# Altium PCB BRD150309.pcbdoc
Units mil, origin at the board's own origin, x right, y up, seen from the top; angles counter-clockwise.
Board outline 1161.42 x 1692.91 mil, 2 copper layers (Top Layer, Bottom Layer), stack 63.824 mil thick; 44 components, 28 nets, 118 pads, 10 vias.
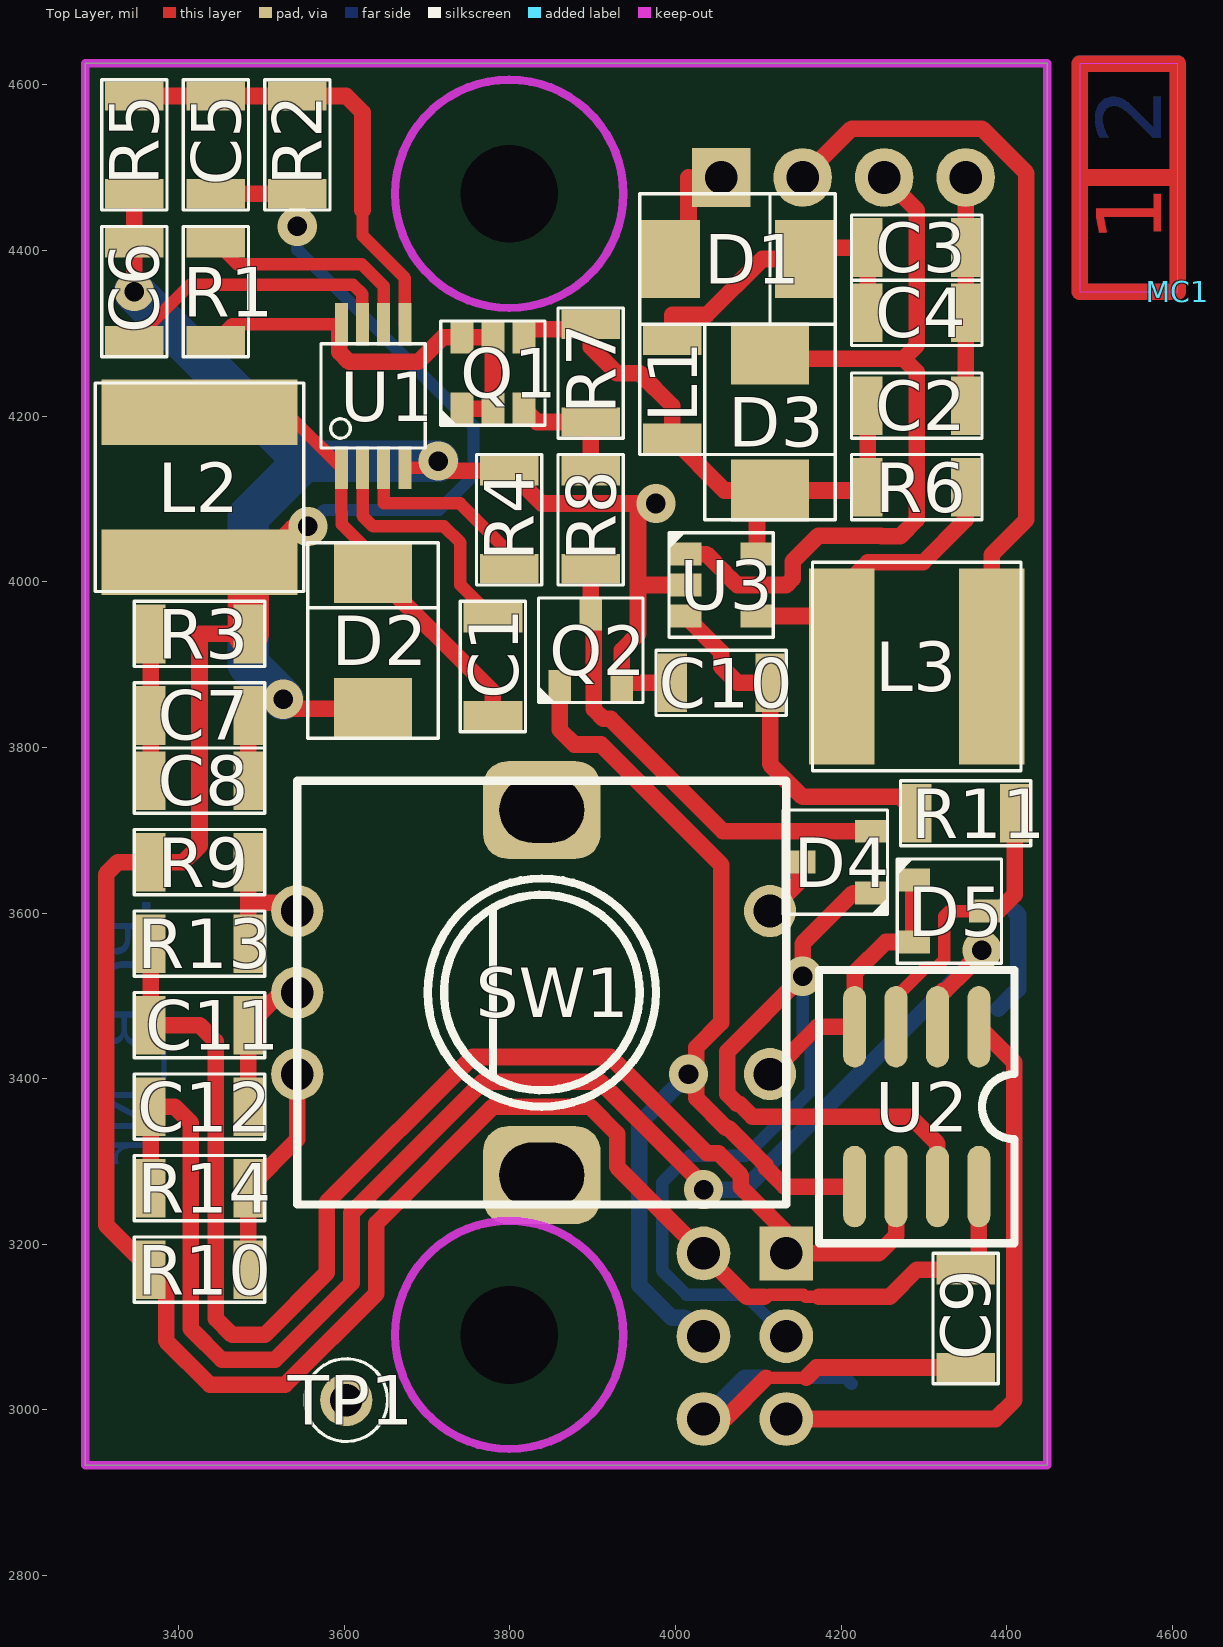
[diagram p0: Top Layer view]
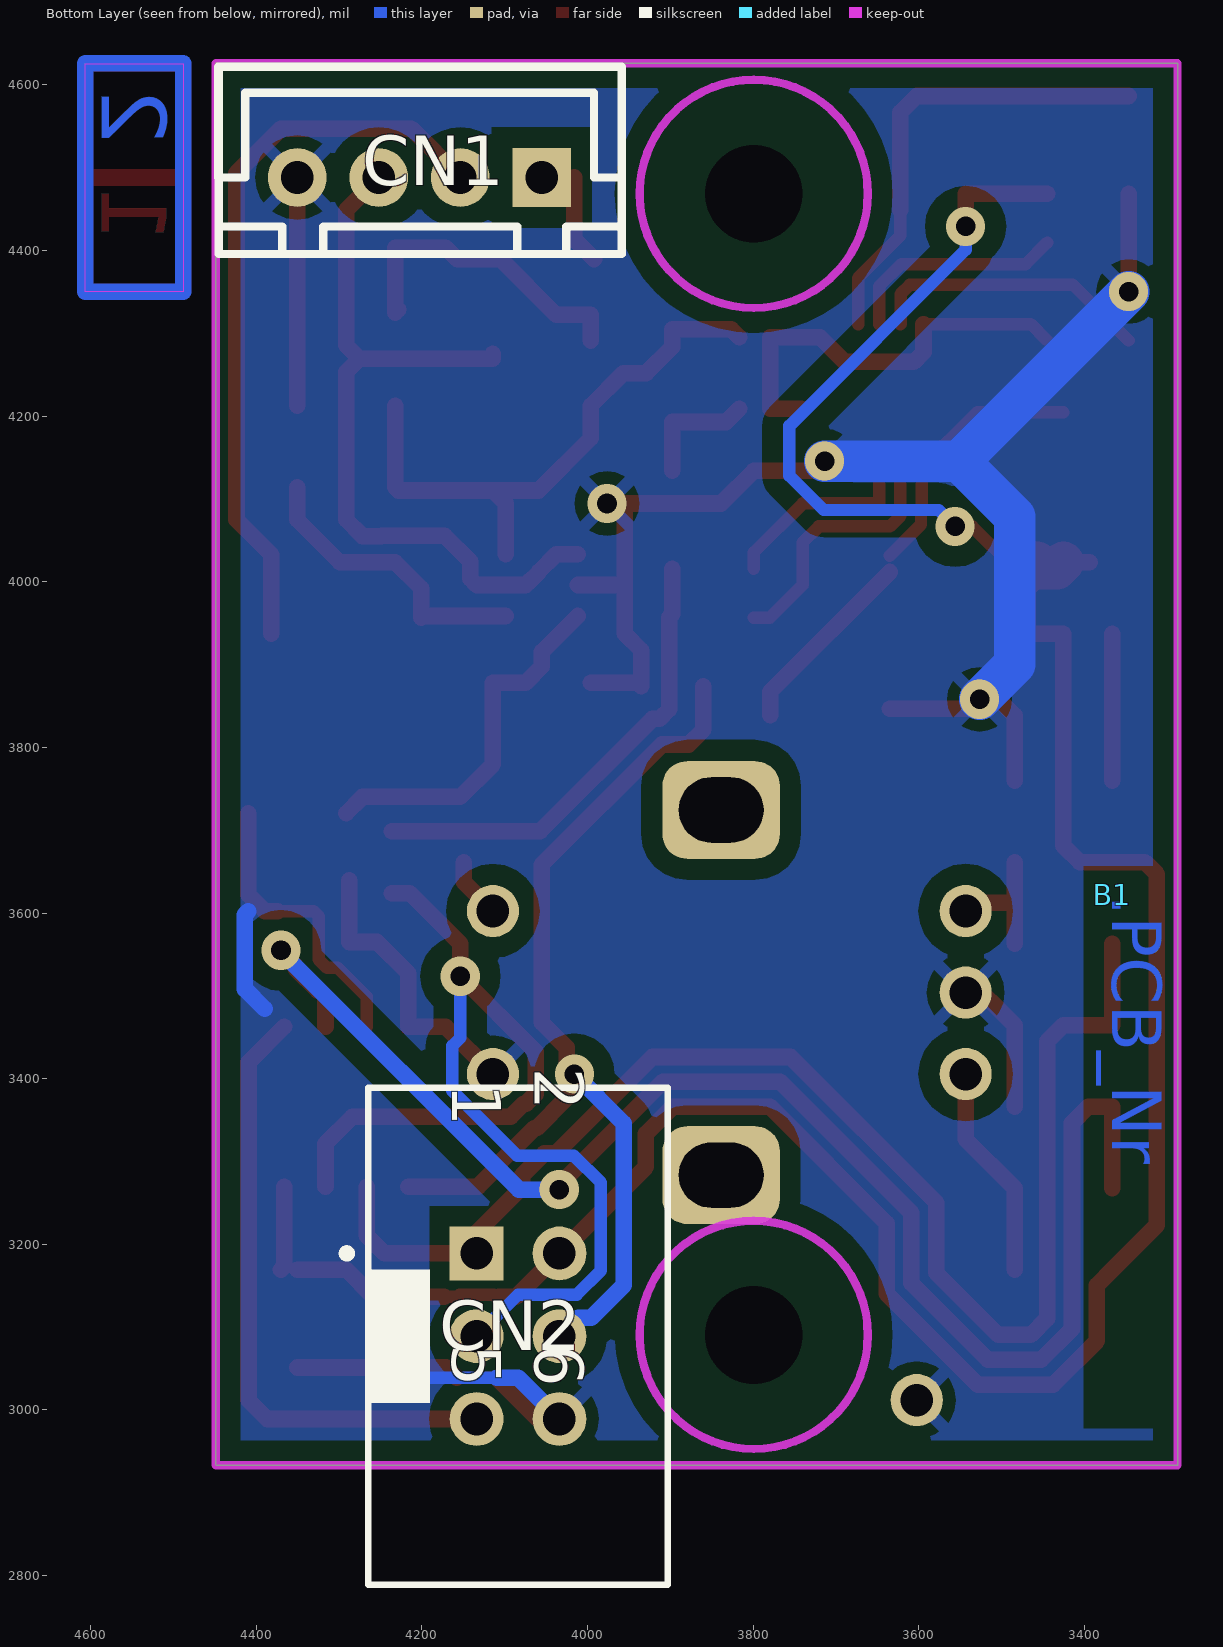
[diagram p1: Bottom Layer view, seen from below]
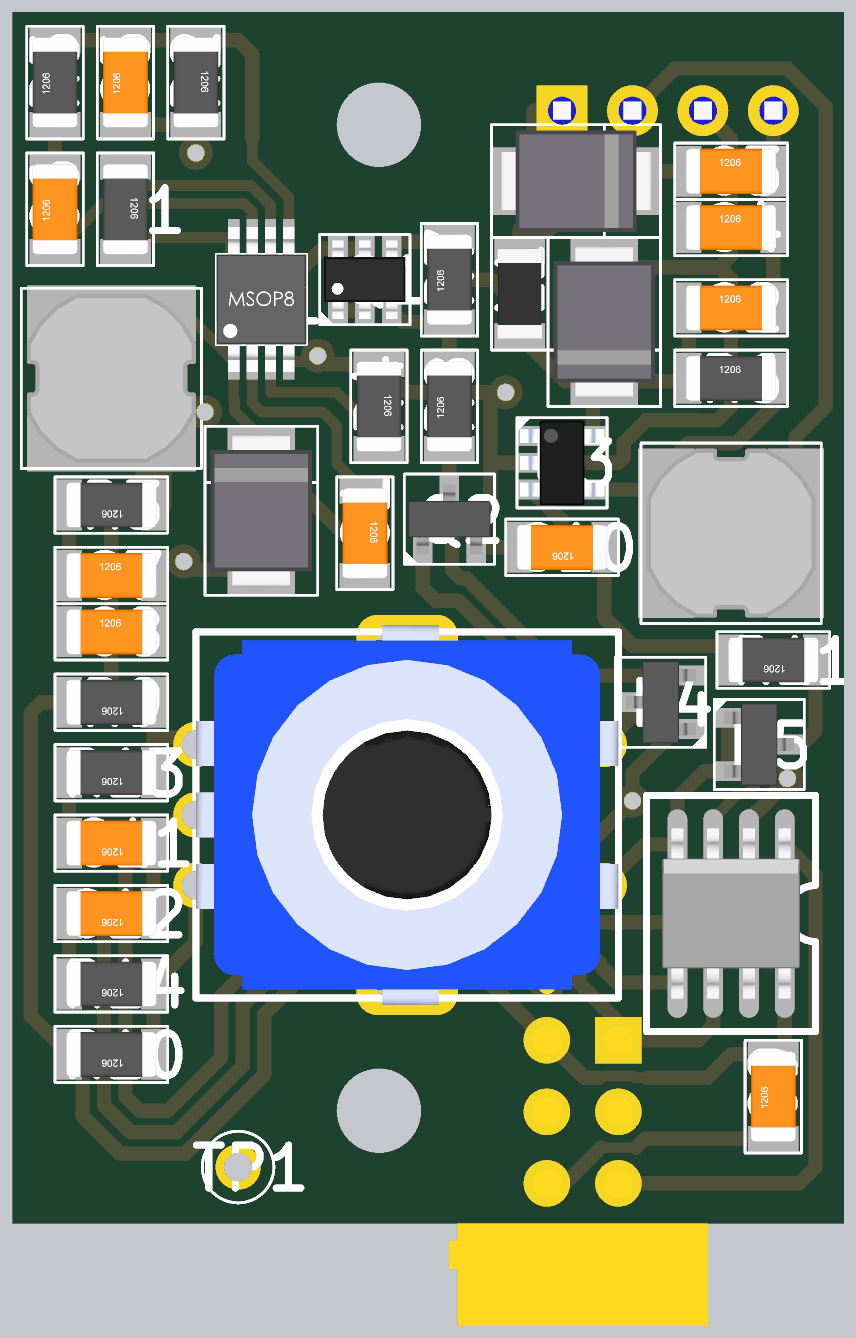
[diagram p2: 3D render of the assembled board from above, using the file's embedded part models]

## Layer stack, top to bottom
Top Solder: solder mask 0.4, Solder Resist, Dk 3.5
Top Layer: signal copper 1.4
Dielectric1: dielectric 61.0236, FR-4, Dk 4.8
Bottom Layer: signal copper 1.4
Bottom Solder: solder mask 0.4, Solder Resist, Dk 3.5

## Board outline
3287.4,2933.07 4448.82,2933.07 4448.82,4625.98 3287.4,4625.98

## Design rules (kind name [scope] priority, off if disabled: settings)
Clearance SC_SOT23_6P [HasFootprint('SC_SOT23_6P') vs HasFootprint('SC_SOT23_6P')] p1: gap=9
Clearance SC_SOT23_5P [HasFootprint('SC_SOT23_5P') vs HasFootprint('SC_SOT23_5P')] p2: gap=9
Clearance SC_MSOP8 [HasFootprint('SC_MSOP8') vs HasFootprint('SC_MSOP8')] p3: gap=9
Clearance SC_SOT23-6 [HasFootprint('SC_SOT23-6') vs HasFootprint('SC_SOT23-6')] p4: gap=9
Clearance Clearance_polygons [InPolygon] p5: gap=25
Clearance Clearance_All [All] p6: gap=10
HoleSize [All] p1: absolutevalues=TRUE maxlimit=125.98 minlimit=23.62 maxpercent=80.000 minpercent=20.000
MinimumAnnularRing [All] p1: minimumring=10
MinimumSolderMaskSliver SilkscreenOverComponentPads [All] p2: minsoldermaskwidth=10
PlaneClearance [All] p1: clearance=50
PolygonConnect [All] p1: connectstyle=Relief reliefconductorwidth=15 reliefentries=4 polygonreliefangle="45 Angle" airgapwidth=15
RoutingVias [All] p1: holewidth=23.62 width=47.24 viastyle="Through Hole" minholewidth=23.62 minwidth=47.24 maxholewidth=23.62 maxwidth=47.24
SolderMaskExpansion [All] p1: expansion=0
Width [All] p1: maxlimit=50 minlimit=15 preferedwidth=20
28 further rules are at their usual default settings.

## Components (designator, comment, footprint, x,y, rotation, side; value= is the part's Value field where it differs from the comment)
B1 "BRD150305/1" MC_BoardNr 3366.14,3622.05 r270 bottom
C1 "YCAM10N" CA_STD1206_H16 3779.53,3897.64 r270 top
C2 "YCAM100N" CA_STD1206_H16 4291.34,4212.6 r0 top
C3 "YCAM10U-5" CA_STD1206_H16 4291.34,4403.54 r0 top
C4 "YCAM10U-5" CA_STD1206_H16 4291.34,4324.8 r0 top
C5 "YCAM4N7" CA_STD1206_H16 3444.88,4527.56 r90 top
C6 "YCAM100N" CA_STD1206_H16 3346.46,4350.39 r90 top
C7 "YCAM2U2-3" CA_STD1206_H16 3425.2,3838.58 r0 top
C8 "YCAM2U2-3" CA_STD1206_H16 3425.2,3759.84 r0 top
C9 "YCAM100N" CA_STD1206_H16 4350.39,3110.24 r90 top
C10 "YCAM100N" CA_STD1206_H16 4055.12,3877.95 r180 top
C11 "YCAM10N" CA_STD1206_H16 3425.2,3464.57 r180 top
C12 "YCAM10N" CA_STD1206_H16 3425.2,3366.14 r180 top
CN1 "CNXH004M1" CN_JST-B4B-XH 4055.12,4488.19 r180 bottom
CN2 "09 18 506 7324" CN_HDR2x3_SHROUDED 4133.86,3188.98 r270 bottom
D1 "YDIOMBR2H100" DI_SMB 4074.8,4389.76 r0 top
D2 "YDIOMBR2H100" DI_SMB 3634.84,3929.13 r90 top
D3 "YDIOMBR2H100" DI_SMB 4114.17,4192.91 r270 top
D4 "YDIOBAT54-1" SC_SOT23_3P 4192.91,3661.42 r90 top
D5 "YDIOBAT54-1" SC_SOT23_3P 4330.71,3602.36 r270 top
L1 "YFIL31" CL_STD1206_H16 3996.06,4232.28 r270 top
L2 "YCOL47U-1" CL_STD6045 3425.2,4114.17 r0 top
L3 "YCOL47U-1" CL_STD6045 4291.34,3897.64 r90 top
MC1 "MC_2LAYER_INDICATOR" MC_2LAYER_INDICATOR 4606.3,4350.39 r90 top
Q1 "ZXMP10A17" SC_SOT23_6P 3779.53,4251.97 r0 top
Q2 "YTRSFDV301N" SC_SOT23_3P 3897.64,3917.32 r0 top
R1 "56K / 1%" RE_STD1206_H6 3444.88,4350.39 r90 top
R2 "YRES330E" RE_STD1206_H6 3543.31,4527.56 r90 top
R3 "0E22/1%" RE_STD1206_H6 3425.2,3937.01 r0 top
R4 "120K/1%" RE_STD1206_H6 3799.21,4074.8 r90 top
R5 "YRES1K" RE_STD1206_H6 3346.46,4527.56 r270 top
R6 "0E33" RE_STD1206_H6 4291.34,4114.17 r180 top
R7 "120K/1%" RE_STD1206_H6 3897.64,4251.97 r270 top
R8 "120K/1%" RE_STD1206_H6 3897.64,4074.8 r270 top
R9 "YRES10K" RE_STD1206_H6 3425.2,3661.42 r0 top
R10 "YRES10K" RE_STD1206_H6 3425.2,3169.29 r0 top
R11 "YRES10K" RE_STD1206_H6 4350.39,3720.47 r0 top
R13 "YRES10K" RE_STD1206_H6 3425.2,3562.99 r0 top
R14 "YRES10K" RE_STD1206_H6 3425.2,3267.72 r0 top
SW1 "PEC12R-4225F-S0024" SW_BOURNS_PEC12R 3838.58,3503.94 r270 top
TP1 "CN001M1" CN_TP_1MM 3602.36,3011.81 r0 top
U1 "YICRLM5007" SC_MSOP8 3634.84,4224.41 r0 top
U2 "ATTINY25-20SSH" SC_SO8_M 4291.34,3366.14 r270 top
U3 "ZXLD1350ET5TA" SC_SOT23_5P 4055.12,3996.06 r270 top

## Footprints (in the part's own frame and the unit in brackets; to place one, negate y for a bottom-side part, rotate by r counter-clockwise, add the part's x,y. Pads: shape width x height; smd on the part's side, far side on the other; paste and mask are expansions set on the pad)
CA_STD1206_H16 [mm] "CA_1206"
  rect 0.9x1.8 smd: 1(-1.5,0) 2(1.5,0)
  silkscreen extent -2,-1 2,1, body extent -1.6,-0.8 1.6,0.8, height 1
CL_STD1206_H16 [mm] "CL_1206"
  rect 0.9x1.8 smd: 1(-1.5,0) 2(1.5,0)
  silkscreen extent -2,-1 2,1, body extent -1.6,-0.8 1.6,0.8, height 1.1
CL_STD6045 [mm] "Standard power inductor 60x60x45mm"
  rect 6x2 smd: 1(0,2.3) 2(0,-2.3)
  silkscreen extent -3.2,-3.2 3.2,3.2, body extent -3,-3 3,3, height 4.51
CN_HDR2x3_SHROUDED [mm] "Connector; IDC, Low Profile Male Header, Thru-Hole; 6 Position; Vertical; Pitch 2.54 mm; Body 15.24 x 9.2 x 9.45 mm (LxWxH)"
  rect 1.65x1.65 hole 1: 1(0,0)
  round 1.65 hole 1: 2(0,2.54) 3(2.54,0) 4(2.54,2.54) 5(5.08,0) 6(5.08,2.54)
  silkscreen extent -5.08,-4.11 10.16,5.87, body extent -5.08,-3.18 10.16,6.02, height 9.45
CN_JST-B4B-XH [mm] "JST 2.5mm disconnectable crimp connector"
  rect 1.8x1.8 hole 1: 1(0,0)
  round 1.8 hole 1: 2(-2.5,0) 3(-5,0) 4(-7.5,0)
  silkscreen extent -9.93,-2.35 2.45,3.4, body extent -9.95,-2.38 2.45,3.37, height 7.02
CN_TP_1MM [mil] "TP_1MM_TH"
  round 63 hole 39.37: 1(0,0)
  silkscreen extent -50,-50 50,50
DI_SMB [mm] "DI_SMB_VCA"
  rect 1.9x2.4 smd: A(-2.1,0) C(2.1,0)
  silkscreen extent -3,-2 3,2, body extent -2.7,-1.8 2.7,1.8, height 2.3
MC_2LAYER_INDICATOR [mil] "2 layer indicator"
  Top Layer lines w20: 137.8,118.11 137.8,0 ; 0,118.11 0,0 275,0 275,118.11 0,118.11
  Bottom Layer lines w20: 275,118.11 0,118.11 ; 275.59,118.11 275.59,0 ; 275,0 0,0 ; 0,118.11 0,0 ; 0,118.11 0,0
  Keep-Out Layer region: 0,0 275,0 275,118.11 0,118.11
MC_BoardNr [mil] "Board number"
RE_STD1206_H6 [mm] "RE_1206"
  rect 0.9x1.8 smd: 1(-1.5,0) 2(1.5,0)
  silkscreen extent -2,-1 2,1, body extent -1.6,-0.8 1.6,0.8, height 1.02
SC_MSOP8 [mm] "Shrink Small Outline; 8 Leads; Body Width 3 mm; Pitch 0.65 mm"
  rect 0.4x1.3 smd: 1(-0.975,-2.2) 2(-0.325,-2.2) 3(0.325,-2.2) 4(0.975,-2.2) 5(0.975,2.2) 6(0.325,2.2) 7(-0.325,2.2) 8(-0.975,2.2)
  silkscreen extent -1.6,-1.6 1.6,1.6, body extent -1.6,-2.57 1.6,2.58, height 1.02
SC_SO8_M [mm] "SOIC, 8-Leads, Body 4.9x3.9mm, Pitch 1.27mm, IPC Low Density"
  oval 2.5x0.7 smd: 1(-2.45,1.905) 2(-2.45,0.635) 3(-2.45,-0.635) 4(-2.45,-1.905) 5(2.45,-1.905) 6(2.45,-0.635) 7(2.45,0.635) 8(2.45,1.905)
  silkscreen extent -4.19,-3 4.19,3, body extent -3.02,-2.45 3.02,2.45, height 1.68
SC_SOT23_3P [mm] "TR_SOT23_V312"
  rect 0.7x1 smd: 1(-0.95,-1.1) 2(0.95,-1.1) 3(0,1.1)
  silkscreen extent -1.6,-1.6 1.6,1.6, body extent -1.46,-1.25 1.46,1.23, height 1.04
SC_SOT23_5P [mm] "IC_SOT23_5P"
  rect 0.7x1 smd: 1(-0.95,-1.1) 2(0,-1.1) 3(0.95,-1.1) 4(0.95,1.1) 5(-0.95,1.1)
  silkscreen extent -1.6,-1.6 1.6,1.6, body extent -1.5,-1.5 1.5,1.5, height 1.3
SC_SOT23_6P [mm] "IC_SOT23_6P"
  rect 0.7x1 smd: 1(-0.95,-1.1) 2(0,-1.1) 3(0.95,-1.1) 4(0.95,1.1) 5(0,1.1) 6(-0.95,1.1)
  silkscreen extent -1.6,-1.6 1.6,1.6, body extent -1.45,-1.4 1.45,1.4, height 1.45
SW_BOURNS_PEC12R [mm]
  round 1.6 hole 1: 1(-2.5,7) 2(2.5,7) A(-2.5,-7.5) B(2.5,-7.5) C(0,-7.5)
  rrect50% 3x3.6 hole 2 slot 2.6 at 90 deg: S(-5.6,0) S(5.6,0)
  silkscreen extent -6.5,-7.5 6.5,7.5, body extent -7.5,-7.5 7.5,7.5, height 16.2

## Part data
B1: library part pcb_nr
C1 C11 C12: "10N"
C2 C6 C9 C10: "100N"
C3 C4: "10U"
C5: "4N7"
C7 C8: "2U2"
CN1: "HEADER, VERT, 1x4WAY"
CN2: "HEADER, VERT, N/LATCH, 2x3WAY"
D1 D2 D3: "MBRS2H100"
D4 D5: "BAT54C"
L1: "600E"
L2 L3: "47UH"
Q2: "FDV301N"
R1: "56K"
R2: "330E"
R3: library part 0E22, "0E22"
R4 R7 R8: "120K"
R5: "1K"
R6: library part 0E33/0,25W
R9 R10 R11 R13 R14: "10K"
SW1: "rotary encoder 24 detents, switch"
TP1: "TEST PIN"
U1: "LM5008AMM/NOPB"
U3: "LED driver"

## Free pads (board coordinates)
  round 0 hole 118.11 unplated: 0(3799.21,3090.55) 0(3799.21,4468.5)

## Via types
v1: diameter 47.24, hole 23.62, Top Layer to Bottom Layer, tented both sides, 10 vias

## Nets (pads, with @x,y where several pads share a name; then routed paths per layer and width w, separated by ;. In a path a pad name is that pad's centre, name@x,y a point inside that pad or via, vN(x,y) a via of type N, cw(c..) or ccw(c..) an arc to the next point about the centre after c; other vN are vias at no path point)
+3V3: C5.1 C9.2 CN2.2 L2.2 R2.1 R3.2 R9.1 R10.1 U2.8 | length 3515.9
  Top Layer w15: L2.2@3484.25,4015.75 3535.43,4066.93 v1(3556.1,4066.93) ; 4107.16,3136.5 4110.7,3136.5 4113.16,3138.96 4154.56,3138.96 4157.02,3136.5 4173.23,3136.5
  Top Layer w20: L2.2@3393.7,4023.62 L2.2 ; C5.1 R2.1 v1(3543.3,4429.12) ; R3.2@3484.25,3937.01 3425.2,3937.01 3425.2,3681.11 3405.51,3661.42 R9.1 3326.77,3661.42 3312.4,3647.05 3312.4,3223.03 R10.1 3384.88,3150.55 3384.88,3083.26 3437.59,3030.55 3528.79,3030.55 3638.77,3140.53 3638.77,3225.39 3779.53,3366.14 3896.81,3366.14 3929.45,3333.51 3929.45,3293.39 CN2.2 4086.34,3136.5 4107.16,3136.5 ; 4173.23,3136.5 4258.54,3136.5 4291.34,3169.29 C9.2 ; U2.8 4366.34,3173.03 C9.2@4370.08,3169.29
  Top Layer w50: L2.2 3433.07,4015.75 L2.2@3464.57,4015.75 ; R3.2 3484.25,3996.06 L2.2@3464.57,4015.75 ; L2.2@3464.57,4015.75 3484.25,4015.75 3476.38,4023.62 3456.69,4023.62 L2.2@3464.57,4015.75
  Bottom Layer w15: v1(3543.3,4429.12) 3543.3,4400.94 3756.07,4188.16 3756.07,4128.06 3714.63,4086.61 3575.79,4086.61 v1(3556.1,4066.93)
/RESET: CN2.5 U2.1 | length 753.6
  Top Layer w20: CN2.5 4386.61,2988.98 4409.34,3011.7 4409.34,3419.6 U2.1
GND: C2.2 C3.2 C4.2 C6.2 C7.2 C8.2 C9.1 C10.2 C11.1 C12.1 CN1.4 CN2.6 D2.A D5.1 D5.2 Q2.2 R4.2 R5.2 SW1.2 SW1.C TP1.1 U1.4 U2.4 U3.2 | length 3304
  Top Layer w15: U1.4 3701.77,4137.8 3709.64,4145.66 v1(3713.57,4145.66) ; 4109.64,3038.98 4158.08,3038.98
  Top Layer w20: v1(3346.46,4350.39) C6.2 R5.2 ; C12.1 C11.1 SW1.C@3543.31,3523.62 ; C8.2 C7.2 3503.76,3858.09 v1(3526.4,3858.09) 3538.03,3846.46 D2.A ; v1(3713.57,4145.66) 3725.38,4133.86 R4.2 3838.58,4094.49 v1@3954.72,4094.49 ; v1(3976.38,4094.49) 3974.41,4092.52 3954.72,4092.52 3954.72,3996.06 ; C10.2 3938.98,3877.95 Q2.2 3935.04,3917.32 3954.72,3937.01 3954.72,3996.06 ; U3.2 3954.72,3996.06 ; CN2.6 4059.64,2988.98 4109.64,3038.98 ; SW1.2 4171.26,3462.6 U2.4 4216.34,3527.36 4253.94,3564.96 D5.2 D5.1 ; 4158.08,3038.98 4170.28,3051.18 C9.1 ; C2.2 C4.2 C3.2 CN1.4
  Bottom Layer w15: 4109.64,3038.98 4205.12,3038.98 4212.6,3031.5
  Bottom Layer w20: CN2.6 4083.86,3038.98 4109.64,3038.98 ; 4389.76,3484.25 4413.7,3508.19 4413.7,3598.11 4409.45,3602.36
  Bottom Layer w50: v1(3346.46,4350.39) 3551.19,4145.66 ; v1(3526.4,3858.09) 3484.25,3900.24 3484.25,4078.72 3551.19,4145.66 ; v1(3713.57,4145.66) 3551.19,4145.66
MISO: C11.2 CN2.1 R13.1 U2.6 | length 1727.8
  Top Layer w20: R13.1 C11.2 3425.2,3464.57 3444.88,3444.88 3444.88,3110.24 3464.57,3090.55 3503.94,3090.55 3578.77,3165.39 3578.77,3250.24 3754.67,3426.14 3921.67,3426.14 4037.89,3309.92 4052.08,3309.92 4079.05,3282.96 4079.05,3268.76 4133.86,3213.95 CN2.1 4245.28,3188.98 4266.34,3210.04 U2.6
MOSI: CN2.4 Q2.1 U2.5 | length 1229.1
  Top Layer w20: Q2.1 3860.24,3821.18 3877.95,3803.46 3910.01,3803.46 4055.12,3658.36 4055.12,3467.62 4025.12,3437.62 4025.12,3376.55 4061.75,3339.92 4064.51,3339.92 4109.05,3295.39 4109.05,3292.62 4131.98,3269.68 U2.5
  Bottom Layer w20: v1(4015.75,3405.51) 3956.38,3346.14 3956.38,3150.4 3995.28,3111.5 4011.34,3111.5 CN2.4
NetC1_1: C1.1 U1.2 | length 316.2
  Top Layer w15: U1.2 3622.22,4137.62 3622.22,4079.55 3634.84,4066.93 3720.47,4066.93 3740.16,4047.24 3740.16,3996.06 C1.1 C1.1@3799.21,3956.69
NetC1_2: C1.2 D2.C L2.1 U1.1 | length 554.3
  Top Layer w15: L2.1 3529.53,4204.72 U1.1 3596.46,4084.73 3597.22,4083.96 3597.22,4069.11 D2.C@3634.84,4031.5
  Top Layer w20: D2.C 3779.53,3867.13 C1.2
NetC2_1: C2.1 D3.C L1.2 Q1.4 R6.2 R7.1 U3.5 | length 719
  Top Layer w20: Q1.4 3826.57,4304.92 3897.64,4304.92 3897.64,4283.47 3929.14,4251.97 3956.7,4251.97 3996.06,4212.6 L1.2 4059.06,4110.24 D3.C ; U3.5 4098.43,4094.49 D3.C ; C2.1 R6.2 4228.35,4110.24 D3.C
NetC3_1: C3.1 C4.1 D1.C L1.1 | length 385.3
  Top Layer w20: L1.1 3996.06,4322.52 4037.81,4322.52 4105.06,4389.76 D1.C 4171.26,4403.54 C3.1 C4.1 C4.1@4228.35,4328.74
NetC5_2: C5.2 R2.2 R5.1 U1.5 | length 560.8
  Top Layer w15: 3622.05,4448.82 3622.05,4417.88 3673.23,4366.7 U1.5
  Top Layer w20: R5.1 C5.2 R2.2 3602.36,4586.61 3622.05,4566.93 3622.05,4448.82
NetC6_1: C6.1 U1.7 | length 344.4
  Top Layer w15: C6.1 3413.74,4358.62 3610.59,4358.62 3621.83,4347.39 3621.83,4311.24 U1.7
NetC7_1: C7.1 C8.1 R3.1 | length 177.2
  Top Layer w20: C8.1 C7.1 R3.1
NetC10_1: C10.1 R11.1 U3.3 | length 446.2
  Top Layer w20: U3.3 4055.12,3915.35 4055.12,3897.64 4074.8,3877.95 C10.1 4114.17,3779.53 4153.54,3740.16 4271.65,3740.16 R11.1
NetC12_2: C12.2 R14.1 U2.2 | length 1857.3
  Top Layer w20: R14.1 C12.2 3395.2,3366.14 3414.88,3346.46 3414.88,3097.81 3452.14,3060.55 3516.36,3060.55 3608.77,3152.96 3608.77,3237.81 3767.1,3396.14 3909.24,3396.14 4034.02,3271.37 v1(4034.02,3265.96) ; U2.2 4316.34,3499.5 4323.02,3506.18 4325.73,3506.18 4352.09,3532.54 4352.09,3535.24 4370.08,3553.24 v1(4370.08,3554.96)
  Bottom Layer w20: v1(4034.02,3265.96) 4082.81,3265.96 4370.08,3553.24 v1(4370.08,3554.96)
NetCN1_1: CN1.1 D1.A | length 108.2
  Top Layer w20: D1.A 4015.75,4413.39 4015.75,4488.19
NetCN1_2: CN1.2 L3.2 | length 890.9
  Top Layer w20: CN1.2 4212.6,4547.24 4370.08,4547.24 4423.82,4493.5 4423.82,4074.8 4381.89,4032.87 L3.2@4381.89,3937.01
NetCN1_3: CN1.3 D3.A U3.1 | length 950.9
  Top Layer w20: U3.1 4037.4,4033.46 4058.74,4012.13 4058.74,4011.4 4070.46,3999.69 4071.18,3999.69 4074.8,3996.06 4133.86,3996.06 4141.42,4003.62 4141.42,4024.55 4172.3,4055.43 4248.44,4055.43 4248.76,4055.12 4271.65,4055.12 4291.34,4074.8 4291.34,4253.31 4275.28,4269.37 ; D3.A 4114.17,4269.37 4275.28,4269.37 ; CN1.3 4291.34,4448.82 4291.34,4285.43 4275.28,4269.37
NetD4_2: D4.2 Q2.3 R8.2 | length 567.1
  Top Layer w20: R8.2 Q2.3 3901.26,3957.01 3901.26,3846.05 3912.98,3834.33 3921.57,3834.33 4057.09,3698.82 D4.2
NetD4_3: D4.3 SW1.1 | length 73.7
  Top Layer w20: SW1.1 4149.61,3637.8 D4.3
NetD5_3: D5.3 R11.2 U2.3 | length 359.3
  Top Layer w15: U2.3 4266.34,3498.62 4301.4,3533.68 4314.34,3533.68 4324.59,3543.93 4324.59,3596.25 4330.71,3602.37 D5.3
  Top Layer w20: D5.3 4389.76,3602.36 4409.45,3622.05 R11.2
NetL3_1: L3.1 R6.1 U3.4 | length 361.8
  Top Layer w20: U3.4 4198.82,3958.66 4200.79,3956.69 4200.79,3992.13 4232.28,4023.62 4299.21,4023.62 4350.39,4074.8 R6.1
NetQ1_1: Q1.1 Q1.2 Q1.5 Q1.6 R1.1 U1.8 | length 517.9
  Top Layer w15: R1.1 3464.57,4311.02 U1.8@3594.17,4311.02
  Top Layer w20: U1.8@3594.17,4311.02 3594.17,4277.15 3605.89,4265.43 3689.39,4265.43 3719.23,4295.28 Q1.6 Q1.5 Q1.2 Q1.1
NetQ1_3: Q1.3 R7.2 R8.1 | length 146.3
  Top Layer w20: Q1.3 3832.68,4192.91 R7.2 R8.1
NetR1_2: R1.2 U1.6 | length 270.4
  Top Layer w15: R1.2 3470.71,4383.62 3620.95,4383.62 3647.64,4356.94 U1.6
NetR4_1: R4.1 U1.3 | length 238.8
  Top Layer w15: U1.3 3647.85,4137.58 3647.85,4094.7 3739.94,4094.7 3799.21,4035.43 R4.1
NetR9_2: R9.2 R13.2 SW1.A | length 161.6
  Top Layer w20: R13.2 3484.25,3612.2 ; R9.2 3484.25,3612.2 ; SW1.A@3543.31,3622.05 3533.46,3612.2 3484.25,3612.2
NetR10_2: R10.2 R14.2 SW1.B | length 280.4
  Top Layer w20: R10.2 R14.2 3543.31,3326.77 SW1.B@3543.31,3425.2
SCK: CN2.3 D4.1 U2.7 | length 1313.9
  Top Layer w20: D4.1 4214.57,3624.02 4153.54,3562.99 v1(4153.54,3523.62) 4062.68,3432.76 4062.68,3381.42 4074.17,3369.92 4076.94,3369.92 4092.84,3354.02 4283.78,3354.02 4316.34,3321.46 U2.7
  Bottom Layer w15: CN2.3 4083.84,3139 4013.16,3139 3983.88,3168.27 3983.88,3274.32 4016.65,3307.09 4016.98,3307.09 4085.04,3307.09 4163.17,3385.22 4163.17,3439.71 4153.54,3449.33 v1(4153.54,3523.62)
pads on no net: SW1.S

## Polygon pours and split planes (outlines as drawn)
GND on Bottom Layer "GND-BOTTOM" (solid, remove dead copper, pour order 4): 3287.4,2814.96 4448.82,2814.96 4448.82,4625.98 3287.4,4625.98 3287.4,2814.96

## Keep-outs
Keep-Out Layer:
  circle w10: c3799.21,4468.5 r137.8
  circle w10: c3799.21,3090.55 r137.8
  lines w10: 3287.4,2933.07 4448.82,2933.07 4448.82,4625.98 3287.4,4625.98 3287.4,2933.07

## Silkscreen, mask and mechanical layers (free items; w line width, h text height)
Mechanical 4:
  lines w5: 200,0 0,0 ; 1400,5550 200,5550 ; 1900,0 1900,200 ; 1900,5550 1900,5750 ; 2900,501 7400,501 ; 2900,801 7400,801 ; 2900,1101 4400,1101 ; 3800,0 3800,200 ; 3800,5550 3800,5750 ; 4400,201 4400,801 4400,1401 ; 5700,0 5700,200 ; 5700,5550 5700,5750 ; 6500,201 6500,801 ; 7400,0 7600,0 ; 0,0 0,5750 7600,5750 7600,0 ; 0,0 7600,0 ; 200,5550 200,200 7400,200 7400,5550 200,5550 ; 2900,201 1500,201 1500,1401 2900,1401 ; 2900,201 7400,201 7400,1401 4400,1401 ; 2900,201 2900,1401 ; 2900,1401 4400,1401 ; 0,2875 200,2875 0,2875 ; 7400,2875 7600,2875 7400,2875
  text "A" at 6635,5669 h70 r90
  text "D" at 985,5619 h70 r270
  text "C" at 2860,5619 h70 r270
  text "B" at 4660,5619 h70 r270
  text "2" at 135,4344 h70 r90
  text "2" at 7535,4344 h70 r90
  text "1" at 135,1469 h70 r90
  text "1" at 7535,1469 h70 r90
  text "ENGINEER:" at 2950,1301 h45
  text "TITLE:" at 4450,1301 h45
  text ".ProjectName" at 4700,1033 h98.43
  text "PCB DESIGNER:" at 2950,1006 h45
  text ".DrawnByX" at 3455,889 h98.43
  text "DATE:" at 2950,701 h45
  text "PART NO.:" at 4450,701 h45
  text "REV:" at 6550,701 h45
  text ".PRINT_DATE" at 3000,581 h70
  text ".RevisionNR" at 6552,568 h98.43
  text "FILE NAME:" at 2950,401 h45
  text "DWG NO:" at 4450,401 h45
  text "SCALE:" at 6550,401 h45
  text ".PCB_Nr" at 4803,305 h98.43
  text ".PCB_FILE_NAME_NO_PATH" at 3000,281 h70
  text "D" at 867,75 h70 r270
  text "C" at 2757,75 h70 r270
  text "B" at 4667,75 h70 r270
  text "A" at 6559,75 h70 r270
Mechanical 5:
  lines w5: 200,0 0,0 ; 200,501 4700,501 ; 200,801 4700,801 ; 1100,201 1100,801 ; 1900,0 1900,200 ; 1900,5550 1900,5750 ; 3200,201 3200,801 3200,1401 ; 3200,1101 4700,1101 ; 3800,0 3800,200 ; 3800,5550 3800,5750 ; 5700,0 5700,200 ; 5700,5550 5700,5750 ; 6200,5550 7400,5550 ; 7400,0 7600,0 ; 0,0 0,5750 7600,5750 7600,0 ; 0,0 7600,0 ; 3200,1401 4700,1401 ; 3200,1401 200,1401 200,201 4700,201 ; 4700,201 6100,201 6100,1401 4700,1401 ; 4700,201 4700,1401 ; 7400,5550 7400,200 200,200 200,5550 7400,5550 ; 0,2875 200,2875 0,2875 ; 7400,2875 7600,2875 7400,2875
  text "A" at 985,5669 h70 r270
  text "B" at 2860,5669 h70 r270
  text "C" at 4660,5669 h70 r270
  text "D" at 6560,5669 h70 r270
  text "2" at 60,4344 h70 r270
  text "2" at 7460,4344 h70 r270
  text "1" at 60,1469 h70 r270
  text "1" at 7460,1469 h70 r270
  text "TITLE:" at 3150,1301 h45
  text "ENGINEER:" at 4650,1301 h45
  text ".ProjectName" at 2935,1041 h98.43
  text "PCB DESIGNER:" at 4650,1006 h45
  text ".DrawnByX" at 4160,886 h98.43
  text "REV:" at 1050,701 h45
  text "PART NO.:" at 3150,701 h45
  text "DATE:" at 4650,701 h45
  text ".PRINT_DATE" at 4600,581 h70
  text ".RevisionNR" at 1082,526 h98.43
  text "SCALE:" at 1050,401 h45
  text "DWG NO:" at 3150,401 h45
  text "FILE NAME:" at 4650,401 h45
  text ".PCB_FILE_NAME_NO_PATH" at 4600,281 h70
  text ".PCB_Nr" at 2845,271 h98.43
  text "B" at 2760,119 h70 r270
  text "C" at 4660,119 h70 r270
  text "D" at 6560,119 h70 r270
  text "A" at 860,69 h70 r270
Mechanical 8:
  circle w19.68: c3799.21,4468.5 r19.68
  circle w19.68: c3799.21,3090.55 r19.68
  lines w10: 3287.4,2933.07 4448.82,2933.07 4448.82,4625.98 3287.4,4625.98 3287.4,2933.07
Drill Drawing:
  lines w8: 300,1600 300,1500 400,1500 ; 300,5400 300,5500 400,5500 ; 7200,1500 7300,1500 7300,1600 ; 7200,5500 7300,5500 7300,5400
  text ".Legend" at 452.76,1653.54 h60

## Dimensions
3287.4,4625.98 to 4448.82,4625.98 on Mechanical 2
3287.4,4625.98 to 3287.4,2933.07 on Mechanical 2

## Text inside footprints (layer, text, board x,y; h text height)
CN2: Bottom Overlay "2" at 4063.39,3413.37 h59.06 r90; Bottom Overlay "1" at 4163.39,3393.69 h59.06 r90; Bottom Overlay "6" at 4063.39,3079.53 h59.06 r90; Bottom Overlay "5" at 4163.39,3079.53 h59.06 r90
MC1: Bottom Layer "2" at 4586.61,4527.56 h78.74 r90; Top Layer "1" at 4586.61,4409.45 h78.74 r90